# Altium PCB Flowmeter.PcbDoc (part 1 of 2)
Units mm, origin at the board's own origin, x right, y up, seen from the top; angles counter-clockwise.
Board outline 90 x 35 mm, 2 copper layers (Top Layer, Bottom Layer); 44 components, 30 nets, 148 pads, 33 vias.
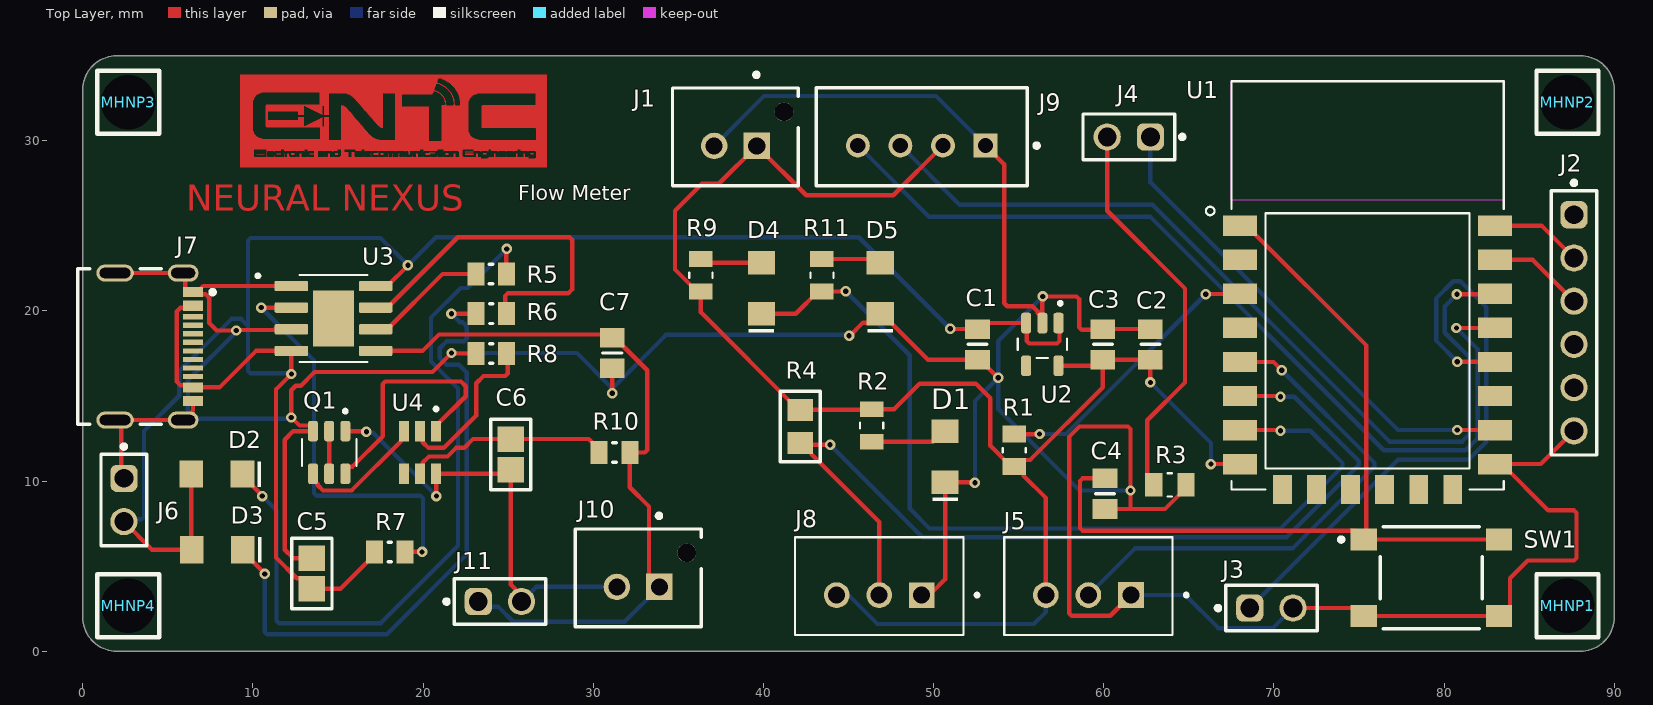
[diagram p0: Top Layer view]
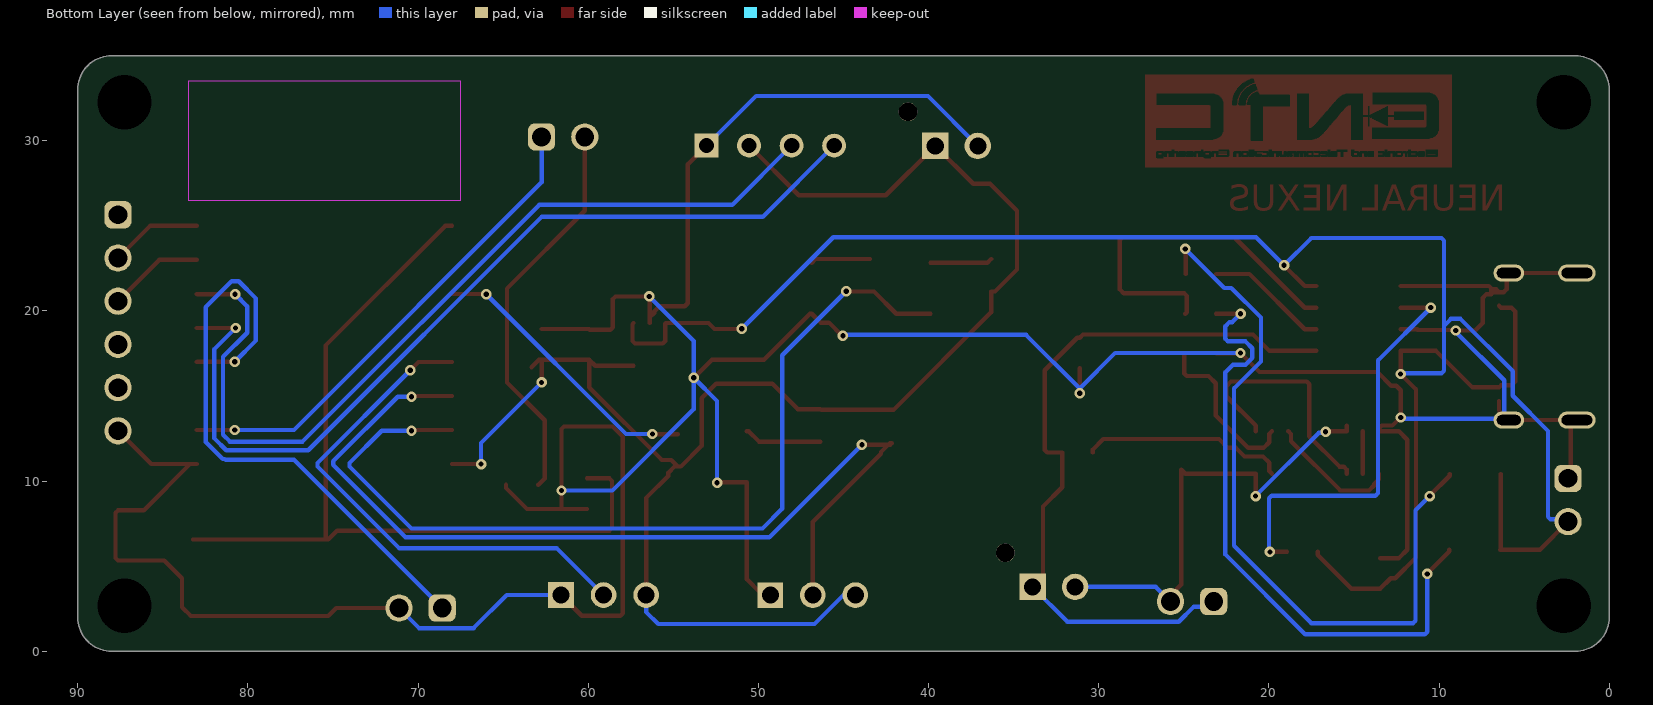
[diagram p1: Bottom Layer view, seen from below]
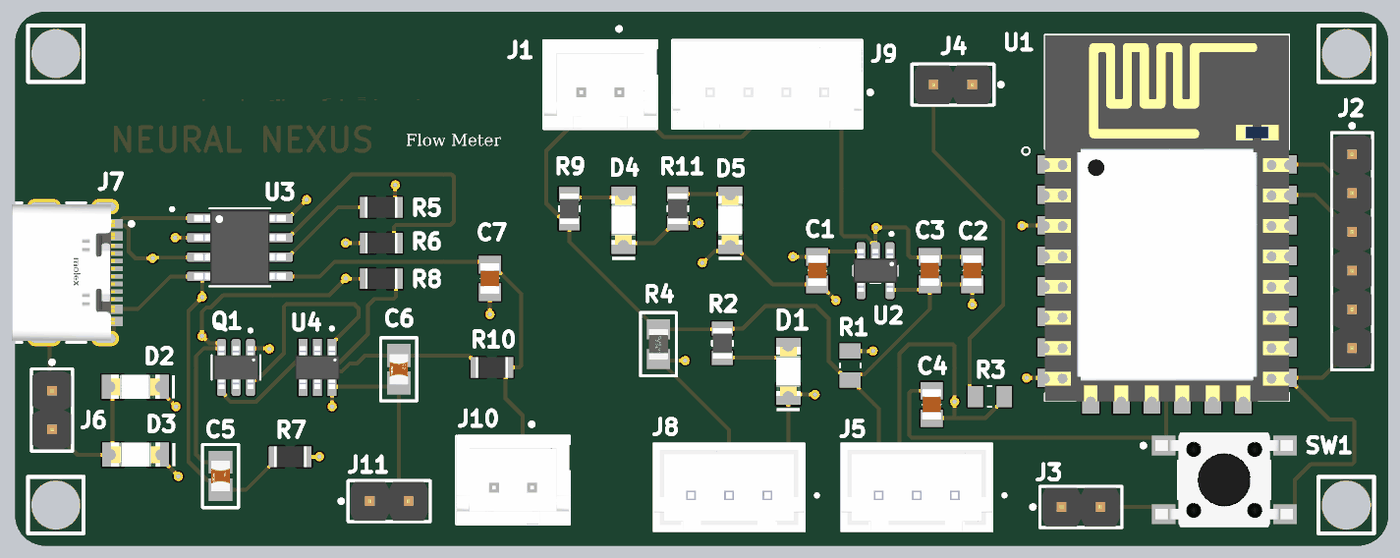
[diagram p2: 3D render of the assembled board from above, using the file's embedded part models]

## Layer stack, top to bottom
Top Solder: solder mask 0.0102, Solder Resist, Dk 3.5
Top Layer: signal copper 0.0356
Dielectric 1: dielectric 0.32, FR-4, Dk 4.8
Bottom Layer: signal copper 0.0356
Bottom Solder: solder mask 0.0102, Solder Resist, Dk 3.5

## Board outline
0,2 0,33 cw(c2,33) 2,35 88,35 cw(c88,33) 90,33 90,2 cw(c88,2) 88,0 2,0 cw(c2,2)

## Design rules (kind name [scope] priority, off if disabled: settings)
Clearance [All] p1: gap=0.254 ignorepadtopadclearanceinfootprint=FALSE except(0.152: SMDPad-SMDPad SMDPad-THPad SMDPad-Via)
HoleSize [All] p1: absolutevalues=TRUE maxlimit=4 minlimit=0.025 maxpercent=80.000 minpercent=20.000
MinimumSolderMaskSliver [All] p1: minsoldermaskwidth=0.08
PolygonConnect [All] p1: connectstyle=Relief reliefconductorwidth=0.254 reliefentries=4 polygonreliefangle="90 Angle" airgapwidth=0.254
RoutingVias [All] p1: holewidth=0.711 width=1.27 viastyle="Through Hole" minholewidth=0.3 minwidth=0.5 maxholewidth=0.711 maxwidth=1.27
SilkToSilkClearance [All] p1: silktosilkclearance=0.2
SilkToSolderMaskClearance [IsPad] p1: minsilkscreentomaskgap=0.2 clearancetoexposedcopper=TRUE
SolderMaskExpansion [All] p1: expansion=0.102 istentingtop=FALSE
SupplyNets "Schematic Supply Nets_2" [InNet('VCC 3V3')] p1: voltage=0.000
SupplyNets "Schematic Supply Nets_1" [InNet('VCC 5V0')] p2: voltage=0.000
SupplyNets "Schematic Supply Nets" [InNet('GND')] p3: voltage=0.000
Width [All] p1: maxlimit=2.54 minlimit=0.254 preferedwidth=0.254 bottomlayer_maxwidth=0.254 minimp=50.000000 maximp=50.000000 favimp=50.000000
26 further rules are at their usual default settings.

## Components (designator, comment, footprint, x,y, rotation, side; value= is the part's Value field where it differs from the comment)
C1 "1uF 10V 0805" CAPC2012X140N 52.578,18.034 r90 top value=1uF
C2 "1uF 10V 0805" CAPC2012X140N 62.738,18.034 r270 top value=1uF
C3 "10uF 10V 0805" CAPC2012X140N 59.944,18.034 r270 top value=10uF
C4 "1uF 10V 0805" CAPC2012X140N 60.071,9.26 r90 top value=1uF
C5 "100nF 50V 0805" FP-CC0805-0_85-IPC_A 13.462,4.572 r270 top value=100nF
C6 "100nF 50V 0805" FP-CC0805-0_85-IPC_A 25.146,11.569 r270 top value=100nF
C7 "10uF 10V 0805" CAPC2012X140N 31.115,17.526 r270 top value=10uF
D1 "Red" WL-SMCW_1206_150120xx75000 50.673,11.43 r90 top
D2 "Green" WL-SMCW_1206_150120xx75000 7.874,10.414 r180 top
D3 "Red" WL-SMCW_1206_150120xx75000 7.898,5.969 r180 top
D4 "Green" WL-SMCW_1206_150120xx75000 39.878,21.336 r90 top
D5 "Red" WL-SMCW_1206_150120xx75000 46.863,21.336 r90 top
J1 "B2B-XH-AM(LF)(SN)" FP-B2B-XH-AM_LF_SN-MFG 38.354,30.226 r0 top
J2 "6 pins" 61300611121 87.63,19.304 r270 top
J3 "2 pin" 61300211121 69.85,2.54 r0 top
J4 "2 pin" 61300211121 61.468,30.226 r180 top
J5 "B3B-XH-A" JST_B3B-XH-A 61.595,3.302 r0 top
J6 "2 pin" 61300211121 2.413,8.89 r270 top
J7 "217179-0001" FP-2171790001-MFG 3.048,17.907 r270 top
J8 "B3B-XH-A" JST_B3B-XH-A 49.3,3.3 r0 top
J9 "B4B-XH-A(LF)(SN)" FP-B4B-XH-A_LF_SN-MFG 49.296,30.243 r0 top
J10 "B2B-XH-AM(LF)(SN)" FP-B2B-XH-AM_LF_SN-MFG 32.634,4.31 r0 top
J11 "2 pin" 61300211121 24.511,2.921 r0 top
MHNP1 "Mounting Hole Non plated 3.2mm" MTHNP3P2MM 87.249,2.667 r90 top
MHNP2 "Mounting Hole Non plated 3.2mm" MTHNP3P2MM 87.249,32.258 r90 top
MHNP3 "Mounting Hole Non plated 3.2mm" MTHNP3P2MM 2.667,32.258 r90 top
MHNP4 "Mounting Hole Non plated 3.2mm" MTHNP3P2MM 2.667,2.667 r90 top
Q1 "FS8205" SOT95P280X145-6N 14.478,11.684 r270 top
R1 "10K 0805" RESC2012X65N 54.737,11.811 r90 top
R2 "150R" RESC2012X60N 46.355,13.274 r90 top
R3 "10K 0805" RESC2012X65N 63.881,9.779 r180 top
R4 "4.7K 0805" FP-CRGCQ0805-IPC_A 42.164,13.208 r90 top
R5 "1K 0805" RESC2013X60X35NL10T20 23.992,22.174 r0 top value=1kR
R6 "1K 0805" RESC2013X60X35NL10T20 24.003,19.837 r180 top value=1kR
R7 "1K 0805" RESC2013X60X35NL10T20 18.034,5.842 r0 top value=1kR
R8 "1K 0805" RESC2013X60X35NL10T20 24,17.5 r0 top value=1kR
R9 "150R" RESC2012X60N 36.322,22.098 r270 top
R10 "RC0805FR-07100RL" RESC2013X60X35NL10T20 31.242,11.684 r180 top
R11 "150R" RESC2012X60N 43.434,22.098 r270 top
SW1 "Push button" FP-PTS645SH50SMTR92LFS-MFG 79.248,4.318 r0 top
U1 "ESP8266-12E/ESP-12E" XCVR_ESP8266-12E/ESP-12E 75.5,18 r0 top
U2 "TLV75733PDBVR" SOT95P280X145-5N 56.388,18.034 r270 top
U3 "Battery Charger" SOP127P600X175-9N 14.732,19.558 r0 top
U4 "DW01A" "SOT95P280X145-6N - duplicate" 19.812,11.684 r270 top

## Footprints (in the part's own frame and the unit in brackets; to place one, negate y for a bottom-side part, rotate by r counter-clockwise, add the part's x,y. Pads: shape width x height; smd on the part's side, far side on the other; paste and mask are expansions set on the pad)
61300211121 [mm] "Pin Header, pitch 2.54 mm, THT, Vertical, single row, 2p"
  rrect50% 1.6x1.6 hole 1.1: 1(-1.27,0)
  round 1.6 hole 1.1: 2(1.27,0)
  silkscreen extent -3.26,-1.35 2.69,1.35, body extent -2.54,-1.27 2.54,1.27, height 8.57
61300611121 [mm] "Pin Header, pitch 2.54 mm, THT, Vertical, single row, 6p"
  rrect50% 1.6x1.6 hole 1.1: 1(-6.35,0)
  round 1.6 hole 1.1: 2(-3.81,0) 3(-1.27,0) 4(1.27,0) 5(3.81,0) 6(6.35,0)
  silkscreen extent -8.34,-1.35 7.77,1.35, body extent -7.62,-1.27 7.62,1.27, height 8.57
CAPC2012X140N [mm]
  rect 1.15x1.45 smd: 1(-0.9,0) 2(0.9,0)
  silkscreen extent 0,-0.55 0,0.55, body extent -1,-0.63 1,0.63, height 1.35
FP-2171790001-MFG [mm]
  rect 0.6x1.15 smd paste+0 mask+0: A1B12(-3.2,3.425) A4B9(-2.4,3.425) B1A12(3.2,3.425) B4A9(2.4,3.425)
  rect 0.3x1.15 smd paste+0 mask+0: A5(-1.25,3.425) A6(-0.25,3.425) A7(0.25,3.425) A8(1.25,3.425) B5(1.75,3.425) B6(0.75,3.425) B7(-0.75,3.425) B8(-1.75,3.425)
  rrect100% 1x1.8 hole 1.4 slot 0.6 at 0 deg paste-2539.97 mask+0: S1(-4.32,2.85) S2(4.32,2.85)
  rrect100% 1x2.2 hole 1.8 slot 0.6 at 0 deg paste-2539.97 mask+0: S3(-4.32,-1.15) S4(4.32,-1.15)
  silkscreen extent -4.57,-3.35 4.57,4.7, body extent -4.92,-3.45 4.92,4.1, height 0.25
FP-B2B-XH-AM_LF_SN-MFG [mm]
  rect 1.55x1.55 hole 1 paste-2539.97 mask+0: 1(1.25,-0.525)
  round 1.55 hole 1 paste-2539.97 mask+0: 2(-1.25,-0.525)
  round 1.1 hole 1.1 unplated paste-2539.97 mask+0: ""(2.85,1.475)
  silkscreen extent -3.7,-2.88 3.7,3.77, body extent -3.8,-2.98 3.8,2.98, height 0.25
FP-B4B-XH-A_LF_SN-MFG [mm]
  rect 1.4x1.4 hole 0.9 paste-2539.97 mask+0: 1(3.75,-0.525)
  round 1.4 hole 0.9 paste-2539.97 mask+0: 2(1.25,-0.525) 3(-1.25,-0.525) 4(-3.75,-0.525)
  silkscreen extent -6.2,-2.88 6.88,2.88, body extent -6.3,-2.98 6.3,2.98, height 0.25
FP-CC0805-0_85-IPC_A [mm]
  rect 1.505x1.556 smd paste+0 mask+0: 1(-0.901,0) 2(0.901,0)
  silkscreen extent -2.07,-1.18 2.07,1.18, body extent -2.15,-1.28 2.15,1.28, height 0.25
FP-CRGCQ0805-IPC_A [mm]
  rect 1.306x1.51 smd paste+0 mask+0: 1(-0.976,0) 2(0.976,0)
  silkscreen extent -2.07,-1.18 2.07,1.18, body extent -2.13,-1.25 2.13,1.25, height 0.25
FP-PTS645SH50SMTR92LFS-MFG [mm]
  rect 1.55x1.3 smd paste+0 mask+0: 1(-3.975,2.25) 2(3.975,2.25) 3(-3.975,-2.25) 4(3.975,-2.25)
  silkscreen extent -5.42,-3 3,3, body extent -4.5,-3 4.5,3, height 4.3
JST_B3B-XH-A [mm]
  rect 1.508x1.508 / inner round 1.508 / far side rect 1.508x1.508 hole 1: 1(0,0)
  round 1.508 hole 1: 2(-2.5,0) 3(-5,0)
  silkscreen extent -7.45,-2.35 3.35,3.4, body extent -7.45,-2.35 2.45,3.4, height 7
MTHNP3P2MM [mm] "Mounting Hole Non plated 3.2mm"
  round 1 hole 3.2: ""(0,0)
  silkscreen extent -1.85,-1.83 1.85,1.83
RESC2012X60N [mm]
  rect 0.92x1.38 smd: 1(-0.955,0) 2(0.955,0)
  silkscreen extent -0.17,-0.68 0.17,0.68, body extent -1,-0.63 1,0.63, height 0.6
RESC2012X65N [mm]
  rect 1.01x1.38 smd: 1(-0.95,0) 2(0.95,0)
  silkscreen extent -0.12,-0.68 0.12,0.68
RESC2013X60X35NL10T20 [mm] "Chip Resistor, 2-Leads, Body 2.1x1.35mm, IPC Medium Density"
  rect 1x1.35 smd: 1(-0.9,0) 2(0.9,0)
  silkscreen extent -0.1,-0.58 0.1,0.58, body extent -1.05,-0.68 1.05,0.67, height 0.6
SOP127P600X175-9N [mm]
  rrect25% 1.97x0.6 smd: 1(-2.475,1.905) 2(-2.475,0.635) 3(-2.475,-0.635) 4(-2.475,-1.905) 5(2.475,-1.905) 6(2.475,-0.635) 7(2.475,0.635) 8(2.475,1.905)
  rect 2.413x3.302 smd paste-3: 9(0,0)
  silkscreen extent -4.54,-2.55 2,2.6, body extent -3,-2.45 3,2.45, height 1.75
SOT95P280X145-5N [mm]
  rrect50% 1.21x0.59 smd: 1(-1.255,0.95) 2(-1.255,0) 3(-1.255,-0.95) 4(1.255,-0.95) 5(1.255,0.95)
  silkscreen extent -2.51,-1.45 0.8,1.45, body extent -1.4,-1.45 1.4,1.45, height 1.45
SOT95P280X145-6N [mm]
  rrect50% 1.21x0.59 smd: 1(-1.255,0.95) 2(-1.255,0) 3(-1.255,-0.95) 4(1.255,-0.95) 5(1.255,0) 6(1.255,0.95)
  silkscreen extent -2.53,-1.6 0.8,1.6, body extent -1.4,-1.45 1.4,1.45, height 1.45
"SOT95P280X145-6N - duplicate" [mm]
  rect 1.21x0.59 smd: 1(-1.255,0.95) 2(-1.255,0) 3(-1.255,-0.95) 4(1.255,-0.95) 5(1.255,0) 6(1.255,0.95)
  silkscreen extent -2.65,0.85 -2.46,1.05, body extent -1.4,-1.45 1.4,1.45, height 1.45
WL-SMCW_1206_150120xx75000 [mm] "SMD Mono-color Chip LED, body 3.2x1.6mm"
  rect 1.4x1.6 smd: 1(-1.5,0) 2(1.5,0)
  silkscreen extent -2.6,-0.75 -2.4,0.75, body extent -1.6,-0.8 1.6,0.8, height 0.68
XCVR_ESP8266-12E/ESP-12E [mm]
  rect 2x1.2 smd: 1(-7.5,7) 2(-7.5,5) 3(-7.5,3) 4(-7.5,1) 5(-7.5,-1) 6(-7.5,-3) 7(-7.5,-5) 8(-7.5,-7) 15(7.5,-7) 16(7.5,-5) 17(7.5,-3) 18(7.5,-1) 19(7.5,1) 20(7.5,3) 21(7.5,5) 22(7.5,7)
  rect 1.1x1.7 smd: 9(-5,-8.5) 10(-3,-8.5) 11(-1,-8.5) 12(1,-8.5) 13(3,-8.5) 14(5,-8.5)
  Keep-Out Layer region: 8,8.51 -8.009,8.51 -8.009,15.5 8,15.5
  Keep-Out Layer region: 8,8.51 -8.009,8.51 -8.009,15.5 8,15.5
  silkscreen extent -9.5,-8.5 8,15.5, body extent -8,-8.55 8,15.45, height 3

## Part data
C1 C2 C4: library part CL21B105KPFNNNE, "CCAP CER 1UF 10V X7R 0805", Capacitor Type=Ceramic, Case/Package=0805, Manufacturer=Samsung, Max Operating Temperature=125°C, Min Operating Temperature=-55°C, Package Shape=Rectangular, Package Style=SMTMeter, Rated DC Voltage (URdc)=10V, Supplier Part Number=1276-1275-1-ND, Temperature Characteristics Code=X7R, Tolerance  (fill in as +-)=10%, Category="Ceramic Capacitors", ComponentLink1Description=https://datasheet.ciiva.com:443/pdfs/VipMasterIC/IC/SEMS/SEMS-S-A0008523501/SEMS-S-A0008523532-1.pdf?src-supplier=IHS+Markit, ComponentLink1URL=https://datasheet.ciiva.com:443/pdfs/VipMasterIC/IC/SEMS/SEMS-S-A0008523501/SEMS-S-A0008523532-1.pdf?src-supplier=IHS+Markit, ComponentLink2Description=https://datasheet.ciiva.com/25799/cl21b105kpfnnne-25799843.pdf?src-supplier=Digikey, ComponentLink2URL=https://datasheet.ciiva.com/25799/cl21b105kpfnnne-25799843.pdf?src-supplier=Digikey, ComponentLink3Description=https://datasheet.ciiva.com/26838/getdatasheetpartid-358362-26838675.pdf?src-supplier=Verical, ComponentLink3URL=https://datasheet.ciiva.com/26838/getdatasheetpartid-358362-26838675.pdf?src-supplier=Verical, ComponentLink4Description=https://datasheet.ciiva.com/16384/cl05b104kq5nnnc-16384501.pdf?src-supplier=Future+Electronics, ComponentLink4URL=https://datasheet.ciiva.com/16384/cl05b104kq5nnnc-16384501.pdf?src-supplier=Future+Electronics, Dielectric Material=Ceramic, Height=1.35mm, JESD-609 Code=e3, Length=2mm, Manufacturer Part Number=CL21B105KPFNNNE, Mounting Technology="Surface Mount", Multilayer=Yes, Packaging="Tape and Reel", Pins=2, Pricing="1=0.1, 10=0.041, 100=0.0237, 1000=0.0151 (USD)", Reach SVHC Compliant=Yes, RoHS=Yes, RoHS Compliant=Yes, Stock=563518, Supplier=Digikey, Terminal Finish=Nickel, Termination=Wraparound, Tolerance (fill in as +-)=10%, Width=1.25mm
C3 C7: library part CL21B106KPQNNNE, "Ceramic Capacitor, Multilayer, Ceramic, 10V, 10% +Tol, 10% -Tol, X7R, 15% TC, 10uF, Surface Mount, 0805", Capacitor Type=Ceramic, Case/Package=0805, Manufacturer=Samsung, Max Operating Temperature=125°C, Min Operating Temperature=-55°C, Package Shape=Rectangular, Package Style=SMTMeter, Rated DC Voltage (URdc)=10V, Supplier Part Number=1276-1764-1-ND, Temperature Characteristics Code=X7R, Tolerance  (fill in as +-)=10%, Category="Ceramic Capacitors", ComponentLink1Description=https://datasheet.ciiva.com:443/pdfs/VipMasterIC/IC/SEMS/SEMS-S-A0008384515/SEMS-S-A0008873201-1.pdf?src-supplier=IHS+Markit, ComponentLink1URL=https://datasheet.ciiva.com:443/pdfs/VipMasterIC/IC/SEMS/SEMS-S-A0008384515/SEMS-S-A0008873201-1.pdf?src-supplier=IHS+Markit, ComponentLink2Description=https://datasheet.ciiva.com/25794/cl21b106kpqnnne-25794947.pdf?src-supplier=Digikey, ComponentLink2URL=https://datasheet.ciiva.com/25794/cl21b106kpqnnne-25794947.pdf?src-supplier=Digikey, Dielectric Material=Ceramic, Height=1.4mm, JESD-609 Code=e3, Length=2mm, Manufacturer Part Number=CL21B106KPQNNNE, Mounting Technology="Surface Mount", Multilayer=Yes, Packaging="Tape and Reel", Pins=2, Pricing="1=0.08, 10=0.03, 100=0.0256, 1000=0.02281 (USD)", Reach SVHC Compliant=Yes, RoHS=Yes, RoHS Compliant=Yes, Stock=679901, Supplier=Digikey, Terminal Finish=Nickel, Termination=Wraparound, Tolerance (fill in as +-)=10%, Width=1.25mm
C5 C6: library part CC0805KRX7R9BB104, "CAP CER 0.1UF 50V X7R 0805", Capacitor Type=Ceramic, Case/Package=0805, Manufacturer=Yageo, Max Operating Temperature=125°C, Min Operating Temperature=-55°C, Package Shape=Rectangular, Package Style=SMTMeter, Rated DC Voltage (URdc)=50V, Supplier Part Number=311-1140-1-ND, Temperature Characteristics Code=X7R, Tolerance  (fill in as +-)=10%, Category="Ceramic Capacitors", ComponentLink1Description=https://datasheet.ciiva.com:443/pdfs/VipMasterIC/IC/YAGO/YAGO-S-A0003557223/YAGO-S-A0003557223-1.pdf?src-supplier=IHS+Markit, ComponentLink1URL=https://datasheet.ciiva.com:443/pdfs/VipMasterIC/IC/YAGO/YAGO-S-A0003557223/YAGO-S-A0003557223-1.pdf?src-supplier=IHS+Markit, ComponentLink2Description=https://datasheet.ciiva.com/11786/0900766b80d84f1d-11786009.pdf?src-supplier=Rs, ComponentLink2URL=https://datasheet.ciiva.com/11786/0900766b80d84f1d-11786009.pdf?src-supplier=Rs, ComponentLink3Description=https://datasheet.ciiva.com/11464/upy-gphc-x7r-6-3v-to-50v-8-11464757.pdf?src-supplier=Avnet, ComponentLink3URL=https://datasheet.ciiva.com/11464/upy-gphc-x7r-6-3v-to-50v-8-11464757.pdf?src-supplier=Avnet, ComponentLink4Description=https://datasheet.ciiva.com/155/mlccorderingcode-155930.pdf?src-supplier=Digikey, ComponentLink4URL=https://datasheet.ciiva.com/155/mlccorderingcode-155930.pdf?src-supplier=Digikey, ComponentLink5Description=https://datasheet.ciiva.com/28450/1489800-28450805.pdf?src-supplier=Element14, ComponentLink5URL=https://datasheet.ciiva.com/28450/1489800-28450805.pdf?src-supplier=Element14, ComponentLink6Description=https://datasheet.ciiva.com/46393/1734573-46393307.pdf?src-supplier=Element14, ComponentLink6URL=https://datasheet.ciiva.com/46393/1734573-46393307.pdf?src-supplier=Element14, ComponentLink7Description=https://datasheet.ciiva.com/155/mlccorderingcode-155929.pdf?src-supplier=Digikey, ComponentLink7URL=https://datasheet.ciiva.com/155/mlccorderingcode-155929.pdf?src-supplier=Digikey, ComponentLink8Description=https://datasheet.ciiva.com/155/mlccorderingcode-155931.pdf?src-supplier=Digikey, ComponentLink8URL=https://datasheet.ciiva.com/155/mlccorderingcode-155931.pdf?src-supplier=Digikey, ComponentLink9Description=https://datasheet.ciiva.com/29242/445210-da-01-en-kerko-chip-0805-x7r-0-1uf-10proz-50vg-29242074.pdf?src-supplier=Conrad, ComponentLink9URL=https://datasheet.ciiva.com/29242/445210-da-01-en-kerko-chip-0805-x7r-0-1uf-10proz-50vg-29242074.pdf?src-supplier=Conrad, Dielectric Material=Ceramic, Height=0.85mm, JESD-609 Code=e3, Length=2mm, Manufacturer Part Number=CC0805KRX7R9BB104, Mounting Technology="Surface Mount", Multilayer=Yes, Packaging="Tape and Reel", Pins=2, Pricing="1=0.08, 10=0.027, 100=0.0192, 1000=0.0136 (USD)", Reach SVHC Compliant=Yes, RoHS=Yes, RoHS Compliant=Yes, Stock=2500824, Supplier=Digikey, Terminal Finish=Nickel, Termination=Wraparound, Tolerance (fill in as +-)=10%, Width=1.25mm
D1 D3 D5: library part 150120RS75000, "Single Color LED, Red, Water Clear, 2mm", Forward Current=30mA, Manufacturer="Wurth Electronics", Max Operating Temperature=85°C, Min Operating Temperature=-40°C, Supplier Part Number=732-4991-1-ND, Category=LEDs, Channels=1, Color=Red, ComponentLink1Description=https://datasheet.ciiva.com:443/pdfs/VipMasterIC/IC/MIDC/MIDC-S-A0007455952/MIDC-S-A0007455952-1.pdf?src-supplier=IHS+Markit, ComponentLink1URL=https://datasheet.ciiva.com:443/pdfs/VipMasterIC/IC/MIDC/MIDC-S-A0007455952/MIDC-S-A0007455952-1.pdf?src-supplier=IHS+Markit, ComponentLink2Description=https://datasheet.ciiva.com/29561/150120rs75000-29561888.pdf?src-supplier=Digikey, ComponentLink2URL=https://datasheet.ciiva.com/29561/150120rs75000-29561888.pdf?src-supplier=Digikey, ComponentLink3Description=https://datasheet.ciiva.com/29279/759442-da-01-en-chipled-1206-w-kl-rot-150120rs75000-29279067.pdf?src-supplier=Conrad, ComponentLink3URL=https://datasheet.ciiva.com/29279/759442-da-01-en-chipled-1206-w-kl-rot-150120rs75000-29279067.pdf?src-supplier=Conrad, ComponentLink4Description=https://datasheet.ciiva.com/48430/150120rs75000-eng-tds-48430054.pdf?src-supplier=Distrelec, ComponentLink4URL=https://datasheet.ciiva.com/48430/150120rs75000-eng-tds-48430054.pdf?src-supplier=Distrelec, ComponentLink5Description=https://datasheet.ciiva.com/22656/1911465-22656982.pdf?src-supplier=Element14, ComponentLink5URL=https://datasheet.ciiva.com/22656/1911465-22656982.pdf?src-supplier=Element14, Lens Style="WATER CLEAR", Luminous Intensity-Nom=150mcd, Manufacturer Part Number=150120RS75000, Mounting Technology="Surface Mount", Optoelectronic Device Type="SINGLE COLOR LED", Overall Height=0.68mm, Packaging="Tape and Reel", Pins=2, Pricing="1=0.23, 50=0.211, 100=0.182, 500=0.17596 (USD)", Reach SVHC Compliant=Yes, RoHS=Yes, RoHS Compliant=Yes, Shape=Rectangular, Size=2mm, Stock=39217, Supplier=Digikey, Terminal Pitch=3mm, Viewing Angle=140°
D2 D4: library part 150120VS75000, "Single Color LED, Bright Green, Water Clear, 2mm", Forward Current=30mA, Manufacturer="Wurth Electronics", Max Operating Temperature=85°C, Min Operating Temperature=-40°C, Supplier Part Number=732-4993-1-ND, Category=LEDs, Channels=1, Color=Green, ComponentLink1Description=https://datasheet.ciiva.com:443/pdfs/VipMasterIC/IC/MIDC/MIDC-S-A0007455949/MIDC-S-A0007455949-1.pdf?src-supplier=IHS+Markit, ComponentLink1URL=https://datasheet.ciiva.com:443/pdfs/VipMasterIC/IC/MIDC/MIDC-S-A0007455949/MIDC-S-A0007455949-1.pdf?src-supplier=IHS+Markit, ComponentLink2Description=https://datasheet.ciiva.com/29561/150120vs75000-29561865.pdf?src-supplier=Digikey, ComponentLink2URL=https://datasheet.ciiva.com/29561/150120vs75000-29561865.pdf?src-supplier=Digikey, ComponentLink3Description=https://datasheet.ciiva.com/29279/759444-da-01-en-chipled-1206-w-kl-h-gruen-150120vs7500-29279050.pdf?src-supplier=Conrad, ComponentLink3URL=https://datasheet.ciiva.com/29279/759444-da-01-en-chipled-1206-w-kl-h-gruen-150120vs7500-29279050.pdf?src-supplier=Conrad, ComponentLink4Description=https://datasheet.ciiva.com/22656/1911467-22656987.pdf?src-supplier=Element14, ComponentLink4URL=https://datasheet.ciiva.com/22656/1911467-22656987.pdf?src-supplier=Element14, ComponentLink5Description=https://datasheet.ciiva.com/29561/150120vs75000-29561867.pdf?src-supplier=Digikey, ComponentLink5URL=https://datasheet.ciiva.com/29561/150120vs75000-29561867.pdf?src-supplier=Digikey, ComponentLink6Description=https://datasheet.ciiva.com/29561/150120vs75000-29561866.pdf?src-supplier=Digikey, ComponentLink6URL=https://datasheet.ciiva.com/29561/150120vs75000-29561866.pdf?src-supplier=Digikey, Lens Style="WATER CLEAR", Luminous Intensity-Nom=40mcd, Manufacturer Part Number=150120VS75000, Mounting Technology="Surface Mount", Optoelectronic Device Type="SINGLE COLOR LED", Overall Height=0.68mm, Packaging="Tape and Reel", Pins=2, Pricing="1=0.23, 50=0.211, 100=0.182, 500=0.17596 (USD)", Reach SVHC Compliant=Yes, RoHS=Yes, RoHS Compliant=Yes, Shape=Rectangular, Size=2mm, Stock=34329, Supplier=Digikey, Terminal Pitch=3mm, Viewing Angle=140°
J1 J10: library part CMP-17439-000037-1, "CONN HEADER VERT 2POS 2.5MM", Color=Green, Contact Resistance=20mR, Housing Color=White, Max Current Rating=3A, Max Operating Temperature=85°C, Max Voltage Rating (AC)=250V, Min Operating Temperature=-25°C, Connector Type="Male Pin", Contact Material=Brass, Contact Plating=Tin, Contact Type="Male Pin", Depth=5.75mm, Fastening Type=Detent, Housing Material=Polyamide, Lead Free="Lead Free", Length=7.4mm, Mount="Through Hole", Number of Positions=2, Number of Rows=1, Orientation=Straight, Packaging=Bulk, Pitch=2.5mm, Series=XH, Termination=Solder
J2: library part 61300611121, "Board Connector, 6 Contact(s), 1 Row(s), Male, Straight, 0.1 inch Pitch, Solder Terminal, Locking, Black Insulator, Plug", Contact Resistance=20mR, Dielectric Withstanding Voltage (AC)=500V, Insulation Color=Black, Insulation Resistance=1GR, Manufacturer="Wurth Electronics", Max Operating Temperature=125°C, Min Operating Temperature=-40°C, Rated Current (Signal)=3A, Supplier Part Number=732-5319-ND, Body Breadth=0.1inch, Body Depth=0.1inch, Body Length=0.6inch, Body/Shell Style=PLUG, Category="Headers and Wire Housings", ComponentLink1Description=https://datasheet.ciiva.com:443/pdfs/VipMasterIC/IC/MIDC/MIDCS07676/MIDCS07676-1.pdf?src-supplier=IHS+Markit, ComponentLink1URL=https://datasheet.ciiva.com:443/pdfs/VipMasterIC/IC/MIDC/MIDCS07676/MIDCS07676-1.pdf?src-supplier=IHS+Markit, ComponentLink2Description=http://www.mouser.com/ds/2/445/6130xx11121-538006.pdf?src-supplier=Mouser, ComponentLink2URL=http://www.mouser.com/ds/2/445/6130xx11121-538006.pdf?src-supplier=Mouser, ComponentLink3Description=http://www.farnell.com/cad/1737268.pdf?src-supplier=Element14, ComponentLink3URL=http://www.farnell.com/cad/1737268.pdf?src-supplier=Element14, ComponentLink4Description=https://datasheet.octopart.com/61300611121-W%C3%BCrth-Elektronik-datasheet-21154836.pdf?src-supplier=Element14, ComponentLink4URL=https://datasheet.octopart.com/61300611121-W%C3%BCrth-Elektronik-datasheet-21154836.pdf?src-supplier=Element14, ComponentLink5Description=https://katalog.we-online.de/em/datasheet/6130xx11121.pdf?src-supplier=Digikey, ComponentLink5URL=https://katalog.we-online.de/em/datasheet/6130xx11121.pdf?src-supplier=Digikey, Connector Type="BOARD CONNECTOR", Contact Finish - Mating=GOLD, Contact Finish - Termination="Gold (Au) - with Nickel (Ni) barrier", Contact Gender=Male, Contact Material="Copper Alloy", Contact Pattern=RECTANGULAR, Contact Style="SQ PIN-SKT", Insulation Material=Polybutylene, JESD-609 Code=e4, Manufacturer Part Number=61300611121, Mating Contact Pitch=0.1inch, Mounting Option 1=LOCKING, Mounting Style=STRAIGHT, Mounting Technology=Board, Number Of Connectors=1, Number of Contacts=6, Number of Rows Loaded=1, PCB Contact Pattern=RECTANGULAR, Pricing="1=0.31, 10=0.268, 25=0.2224, 50=0.1864, 100=0.1683, 1000=0.1539 (USD)", Reach SVHC Compliant=Yes, Reference Standard=UL, Reliability=COMMERCIAL, RoHS=Yes, RoHS Compliant=Yes, Stock=15473, Supplier=Digikey, Terminal Length=0.118inch, Terminal Pitch=2.54mm, Termination=Solder
J3 J4 J6 J11: library part 61300211121, "Board Connector, 2 Contact(s), 1 Row(s), Male, Straight, 0.1 inch Pitch, Solder Terminal, Locking, Black Insulator, Plug", Contact Resistance=20mR, Dielectric Withstanding Voltage (AC)=500V, Flammability Rating="UL94 V-0", Insulation Color=Black, Insulation Resistance=1GR, Manufacturer="Wurth Electronics", Max Operating Temperature=125°C, Min Operating Temperature=-40°C, Rated Current (Signal)=3A, Supplier Part Number=732-5315-ND, Body Breadth=0.1inch, Body Depth=0.1inch, Body Length=0.2inch, Body/Shell Style=PLUG, Category="Headers and Wire Housings", ComponentLink1Description=https://datasheet.ciiva.com:443/pdfs/VipMasterIC/IC/MIDC/MIDCS07676/MIDCS07676-1.pdf?src-supplier=IHS+Markit, ComponentLink1URL=https://datasheet.ciiva.com:443/pdfs/VipMasterIC/IC/MIDC/MIDCS07676/MIDCS07676-1.pdf?src-supplier=IHS+Markit, ComponentLink2Description=https://datasheet.ciiva.com/13619/6130xx11121-48870-13619345.pdf?src-supplier=Mouser, ComponentLink2URL=https://datasheet.ciiva.com/13619/6130xx11121-48870-13619345.pdf?src-supplier=Mouser, Connector Type="BOARD CONNECTOR", Contact Finish - Mating=GOLD, Contact Finish - Termination="Gold (Au) - with Nickel (Ni) barrier", Contact Gender=Male, Contact Material="Copper Alloy", Contact Pattern=RECTANGULAR, Contact Style="SQ PIN-SKT", DIN Conformance=No, Filter Feature=No, IEC Conformance=No, Insulation Material=Polybutylene, JESD-609 Code=e4, Manufacturer Part Number=61300211121, Mating Contact Pitch=0.1inch, MIL Conformance=No, Mixed Contacts=No, Mounting Option 1=LOCKING, Mounting Style=STRAIGHT, Mounting Technology=Board, Number Of Connectors=1, Number of Contacts=2, Number of Rows Loaded=1, Option="General Purpose", PCB Contact Pattern=RECTANGULAR, Pricing="1=0.12, 10=0.102, 25=0.0848, 50=0.0712, 100=0.0639, 1000=0.06 (USD)", Reach SVHC Compliant=Yes, Reference Standard=UL, Reliability=COMMERCIAL, RoHS=Yes, RoHS Compliant=Yes, Stock=191097, Supplier=Digikey, Terminal Length=0.118inch, Terminal Pitch=2.54mm, Termination=Solder
J5 J8: "Connector Header Through Hole 3 position 0.098 (2.50mm)", Package=None, Check_prices=https://www.snapeda.com/parts/B3B-XH-A/JST+Sales+America+Inc./view-part/?ref=eda, MF="JST Sales", MP=B3B-XH-A, SnapEDA_Link=https://www.snapeda.com/parts/B3B-XH-A/JST+Sales+America+Inc./view-part/?ref=snap
J7: "CONN RCP USB2.0 TYP C 24P SMD RA", LCSC Part Number=C3197684, Manufacturer=Molex, Supplier Part Number=900-2171790001CT-ND, Category=Connectors, Manufacturer Part Number=217179-0001, Pricing="1=0.9, 10=0.745, 100=0.6212 (USD)", RoHS=No, Stock=7228, Supplier=Digikey
J9: library part CMP-17439-000250-1, "CONN HEADER VERT 4POS 2.5MM", Color=Natural, Contact Resistance=20mR, Current Rating=3A, Flammability Rating="UL94 V-0", Housing Color=White, Insulation Resistance=1GR, Max Operating Temperature=85°C, Max Voltage Rating (AC)=250V, Min Operating Temperature=-25°C, Package Quantity=500, Connector Type=Header, Contact Finish - Mating=TIN, Contact Material=Brass, Contact Plating=Tin, Contact Shape=Square, Contact Type="Male Pin", Depth=5.75mm, Fastening Type=Detent, Gender=Male, Housing Material=Polyamide, Insulation Color=Natural, Insulation Material=Nylon, Lead Free="Lead Free", Lead Pitch=2.5mm, Length=12.4mm, Mated Stacking Heights=9.8mm, Material=Polyamide, Max Current Rating=3A, Max Voltage Rating (DC)=250V, Mount="Through Hole", Number of Contacts=4, Number of Positions=4, Number of Rows=1, Orientation=Straight, Packaging=Bulk, Pitch=2.5mm, REACH SVHC="No SVHC", Series=XH, Termination=Solder, Voltage Rating=250V, Voltage Rating (AC)=250V, Wire/Cable Gauge=22AWG
MHNP1 MHNP2 MHNP3 MHNP4: library part MTHNP3P2MM
Q1: "Dual N-Channel Enhancement Mode Power MOSFET", Package=Package, Check_prices=https://www.snapeda.com/parts/FS8205/Fortune+Semiconductor/view-part/?ref=eda, MF="Fortune Semiconductor", MP=FS8205, SnapEDA_Link=https://www.snapeda.com/parts/FS8205/Fortune+Semiconductor/view-part/?ref=snap
R1 R3: library part RMCF0805FT10K0, "RES 10K OHM 1% 1/8W 0805", Package=None, Availability=Unavailable, MF="{'manufacturer': u'Stackpole Electronics Inc'}", MP=RMCF0805FT10K0, Price=None
R2 R9 R11: library part RC0805FR-07150RL, "Fixed Resistor, Metal Glaze/thick Film, 0.125W, 150ohm, 150V, 1% +/-Tol, 100ppm/Cel, Surface Mount, 0805", Case/Package=0805, Manufacturer=Yageo, Max Operating Temperature=155°C, Min Operating Temperature=-55°C, Package Height=0.5mm, Package Length=2mm, Package Shape=Rectangular, Package Width=1.25mm, Power=125mW, Rated Temperature=70°C, Resistor Type="FIXED RESISTOR", Supplier Part Number=311-150CRCT-ND, Temperature Coefficient (ppm/Cel)=100, Tolerance=1%, Working Voltage=150V, Additional Feature="LASER TRIMMABLE", Category="Chip SMD Resistors", ComponentLink1Description=https://datasheet.ciiva.com:443/pdfs/VipMasterIC/IC/YAGO/YAGO-S-A0008145938/YAGO-S-A0008145938-1.pdf?src-supplier=IHS+Markit, ComponentLink1URL=https://datasheet.ciiva.com:443/pdfs/VipMasterIC/IC/YAGO/YAGO-S-A0008145938/YAGO-S-A0008145938-1.pdf?src-supplier=IHS+Markit, ComponentLink2Description=https://datasheet.ciiva.com/11819/0900766b8106beab-11819782.pdf?src-supplier=Rs, ComponentLink2URL=https://datasheet.ciiva.com/11819/0900766b8106beab-11819782.pdf?src-supplier=Rs, ComponentLink3Description=https://datasheet.ciiva.com/2456/pyu-r-int-thick-7-2456999.pdf?src-supplier=Digikey, ComponentLink3URL=https://datasheet.ciiva.com/2456/pyu-r-int-thick-7-2456999.pdf?src-supplier=Digikey, ComponentLink4Description=https://datasheet.ciiva.com/2457/pyu-r-int-thick-7-2457000.pdf?src-supplier=Digikey, ComponentLink4URL=https://datasheet.ciiva.com/2457/pyu-r-int-thick-7-2457000.pdf?src-supplier=Digikey, ComponentLink5Description=https://datasheet.ciiva.com/2457/pyu-r-int-thick-7-2457001.pdf?src-supplier=Digikey, ComponentLink5URL=https://datasheet.ciiva.com/2457/pyu-r-int-thick-7-2457001.pdf?src-supplier=Digikey, ComponentLink6Description=https://datasheet.ciiva.com/12668/rc0805-12668251.pdf?src-supplier=Mouser, ComponentLink6URL=https://datasheet.ciiva.com/12668/rc0805-12668251.pdf?src-supplier=Mouser, ComponentLink7Description=https://datasheet.ciiva.com/7660/38627-7660798.pdf?src-supplier=Element14, ComponentLink7URL=https://datasheet.ciiva.com/7660/38627-7660798.pdf?src-supplier=Element14, ComponentLink8Description=https://datasheet.ciiva.com/46447/444164-46447566.pdf?src-supplier=Element14, ComponentLink8URL=https://datasheet.ciiva.com/46447/444164-46447566.pdf?src-supplier=Element14, Construction=Chip, JESD-609 Code=e3, Manufacturer Part Number=RC0805FR-07150RL, Mounting Technology="Surface Mount", Packaging="Tape and Reel", Pins=2, Pricing="1=0.1, 10=0.014, 100=0.0112, 1000=0.00714 (USD)", Reach SVHC Compliant=Yes, RoHS=Yes, RoHS Compliant=Yes, Stock=933412, Supplier=Digikey, Technology="METAL GLAZE/THICK FILM", Terminal Finish=Nickel, Termination=Wraparound
R4: library part CRGCQ0805F4K7, "Fixed Resistor, Metal Glaze/thick Film, 0.125W, 4700ohm, 150V, 1% +/-Tol, 100ppm/Cel, Surface Mount, 0805", Manufacturer="TE Connectivity", Resistor Type="FIXED RESISTOR", Supplier Part Number=A129757CT-ND, Category="Chip SMD Resistors", ComponentLink1Description=https://datasheet.ciiva.com:443/pdfs/VipMasterIC/IC/TYEL/TYEL-S-A0004929575/TYEL-S-A0004929575-1.pdf?src-supplier=IHS+Markit, ComponentLink1URL=https://datasheet.ciiva.com:443/pdfs/VipMasterIC/IC/TYEL/TYEL-S-A0004929575/TYEL-S-A0004929575-1.pdf?src-supplier=IHS+Markit, ComponentLink2Description=http://datasheet.octopart.com/CRGCQ0805F4K7-TE-Connectivity-datasheet-114679081.pdf?src-supplier=Mouser, ComponentLink2URL=http://datasheet.octopart.com/CRGCQ0805F4K7-TE-Connectivity-datasheet-114679081.pdf?src-supplier=Mouser, ComponentLink3Description=http://datasheet.octopart.com/CRGCQ0805F4K7-TE-Connectivity-datasheet-114679081.pdf?src-supplier=Verical, ComponentLink3URL=http://datasheet.octopart.com/CRGCQ0805F4K7-TE-Connectivity-datasheet-114679081.pdf?src-supplier=Verical, ComponentLink4Description=http://datasheet.octopart.com/CRGCQ0805F4K7-TE-Connectivity-datasheet-114679081.pdf?src-supplier=Onlinecomponents.com, ComponentLink4URL=http://datasheet.octopart.com/CRGCQ0805F4K7-TE-Connectivity-datasheet-114679081.pdf?src-supplier=Onlinecomponents.com, ComponentLink5Description=http://datasheet.octopart.com/CRGCQ0805F4K7-TE-Connectivity-datasheet-114679081.pdf?src-supplier=Arrow+Electronics, ComponentLink5URL=http://datasheet.octopart.com/CRGCQ0805F4K7-TE-Connectivity-datasheet-114679081.pdf?src-supplier=Arrow+Electronics, ComponentLink6Description=http://datasheet.octopart.com/CRGCQ0805F4K7-TE-Connectivity-datasheet-114679081.pdf?src-supplier=Digikey, ComponentLink6URL=http://datasheet.octopart.com/CRGCQ0805F4K7-TE-Connectivity-datasheet-114679081.pdf?src-supplier=Digikey, ComponentLink7Description=https://www.te.com/commerce/DocumentDelivery/DDEController?Action=srchrtrv&amp;DocNm=1773204-3&amp;DocType=DS&amp;DocLang=English&src-supplier=Digikey, ComponentLink7URL=https://www.te.com/commerce/DocumentDelivery/DDEController?Action=srchrtrv&amp;DocNm=1773204-3&amp;DocType=DS&amp;DocLang=English&src-supplier=Digikey, ComponentLink8Description=http://datasheet.octopart.com/CRGCQ0805F4K7-TE-Connectivity-datasheet-114679081.pdf?src-supplier=Newark, ComponentLink8URL=http://datasheet.octopart.com/CRGCQ0805F4K7-TE-Connectivity-datasheet-114679081.pdf?src-supplier=Newark, ComponentLink9Description=http://datasheet.octopart.com/CRGCQ0805F4K7-TE-Connectivity-datasheet-114679081.pdf?src-supplier=Avnet, ComponentLink9URL=http://datasheet.octopart.com/CRGCQ0805F4K7-TE-Connectivity-datasheet-114679081.pdf?src-supplier=Avnet, ComponentLink10Description=http://datasheet.octopart.com/CRGCQ0805F4K7-TE-Connectivity-datasheet-114679081.pdf?src-supplier=Farnell, ComponentLink10URL=http://datasheet.octopart.com/CRGCQ0805F4K7-TE-Connectivity-datasheet-114679081.pdf?src-supplier=Farnell, ComponentLink11Description=https://4donline.ihs.com/images/VipMasterIC/IC/TYEL/TYEL-S-A0004929575/TYEL-S-A0004929575-1.pdf?hkey=52A5661711E402568146F3353EA87419&src-supplier=Farnell, ComponentLink11URL=https://4donline.ihs.com/images/VipMasterIC/IC/TYEL/TYEL-S-A0004929575/TYEL-S-A0004929575-1.pdf?hkey=52A5661711E402568146F3353EA87419&src-supplier=Farnell, ComponentLink12Description=http://datasheet.octopart.com/CRGCQ0805F4K7-TE-Connectivity-datasheet-114679081.pdf?src-supplier=TME, ComponentLink12URL=http://datasheet.octopart.com/CRGCQ0805F4K7-TE-Connectivity-datasheet-114679081.pdf?src-supplier=TME, ComponentLink13Description=http://datasheet.octopart.com/CRGCQ0805F4K7-TE-Connectivity-datasheet-114679081.pdf?src-supplier=Electro+Sonic, ComponentLink13URL=http://datasheet.octopart.com/CRGCQ0805F4K7-TE-Connectivity-datasheet-114679081.pdf?src-supplier=Electro+Sonic, ComponentLink14Description=http://datasheet.octopart.com/CRGCQ0805F4K7-TE-Connectivity-datasheet-114679081.pdf?src-supplier=Sager+Electronics, ComponentLink14URL=http://datasheet.octopart.com/CRGCQ0805F4K7-TE-Connectivity-datasheet-114679081.pdf?src-supplier=Sager+Electronics, ComponentLink15Description=http://datasheet.octopart.com/CRGCQ0805F4K7-TE-Connectivity-datasheet-114679081.pdf?src-supplier=Heilind+Electronics, ComponentLink15URL=http://datasheet.octopart.com/CRGCQ0805F4K7-TE-Connectivity-datasheet-114679081.pdf?src-supplier=Heilind+Electronics, ComponentLink16Description=https://datasheet.octopart.com/CRGCQ0805F4K7-TE-Connectivity-datasheet-114679081.pdf?src-supplier=Master+Electronics, ComponentLink16URL=https://datasheet.octopart.com/CRGCQ0805F4K7-TE-Connectivity-datasheet-114679081.pdf?src-supplier=Master+Electronics, Manufacturer Part Number=CRGCQ0805F4K7, Pins=2, Pricing="1=0.1, 10=0.036, 100=0.0183, 1000=0.01057, 2500=0.00886 (USD)", Reach SVHC Compliant=Yes, RoHS=Yes, RoHS Compliant=Yes, Stock=634679, Supplier=Digikey
R5 R6 R7 R8: library part RC0805FR-071KL, "RES 1K OHM 1% 1/8W 0805", Case/Package=0805, Manufacturer=Yageo, Max Operating Temperature=155°C, Min Operating Temperature=-55°C, Package Height=0.5mm, Package Length=2mm, Package Shape=Rectangular, Package Width=1.25mm, Power=125mW, Rated Temperature=70°C, Resistor Type="FIXED RESISTOR", Supplier Part Number=311-1.00KCRCT-ND, Temperature Coefficient (ppm/Cel)=100, Tolerance=1%, Working Voltage=150V, Additional Feature="LASER TRIMMABLE", Category="Chip SMD Resistors", ComponentLink1Description=https://datasheet.ciiva.com:443/pdfs/VipMasterIC/IC/YAGO/YAGO-S-A0008145938/YAGO-S-A0008145938-1.pdf?src-supplier=IHS+Markit, ComponentLink1URL=https://datasheet.ciiva.com:443/pdfs/VipMasterIC/IC/YAGO/YAGO-S-A0008145938/YAGO-S-A0008145938-1.pdf?src-supplier=IHS+Markit, ComponentLink2Description=https://datasheet.ciiva.com/7941/1686128-7941719.pdf?src-supplier=Element14, ComponentLink2URL=https://datasheet.ciiva.com/7941/1686128-7941719.pdf?src-supplier=Element14, ComponentLink3Description=https://datasheet.ciiva.com/46385/444164-46385020.pdf?src-supplier=Element14, ComponentLink3URL=https://datasheet.ciiva.com/46385/444164-46385020.pdf?src-supplier=Element14, ComponentLink4Description=https://datasheet.ciiva.com/2456/pyu-r-int-thick-7-2456976.pdf?src-supplier=Digikey, ComponentLink4URL=https://datasheet.ciiva.com/2456/pyu-r-int-thick-7-2456976.pdf?src-supplier=Digikey, ComponentLink5Description=https://datasheet.ciiva.com/2456/pyu-r-int-thick-7-2456977.pdf?src-supplier=Digikey, ComponentLink5URL=https://datasheet.ciiva.com/2456/pyu-r-int-thick-7-2456977.pdf?src-supplier=Digikey, ComponentLink6Description=https://datasheet.ciiva.com/2456/pyu-r-int-thick-7-2456975.pdf?src-supplier=Digikey, ComponentLink6URL=https://datasheet.ciiva.com/2456/pyu-r-int-thick-7-2456975.pdf?src-supplier=Digikey, ComponentLink7Description=https://datasheet.ciiva.com/16850/rc0805-16850409.pdf?src-supplier=Future+Electronics, ComponentLink7URL=https://datasheet.ciiva.com/16850/rc0805-16850409.pdf?src-supplier=Future+Electronics, Construction=Chip, JESD-609 Code=e3, Manufacturer Part Number=RC0805FR-071KL, Mounting Technology="Surface Mount", Packaging="Tape and Reel", Pins=2, Pricing="1=0.1, 10=0.012, 100=0.0112, 1000=0.00714 (USD)", Reach SVHC Compliant=Yes, RoHS=Yes, RoHS Compliant=Yes, Stock=458544, Supplier=Digikey, Technology="METAL GLAZE/THICK FILM", Terminal Finish=Nickel, Termination=Wraparound
R10: library part CMP-2100-03669-1, "Chip Resistor, 100 Ohm, +/-1%, 0.125 W, -55 to 155 degC, 0805 (2012 Metric), RoHS, Tape and Reel", Case Code (Imperial)=0805, Case Code (Metric)=2012, Manufacturer=Yageo, Max Operating Temperature=155degC, Max Power Dissipation=125mW, Min Operating Temperature=-55degC, Package Description="2-Pin Surface Mounted Device, Body 2 x 1.25 mm", Package Quantity=1, Resistance=100Ohm, Temperature Coefficient=100ppm/degreesC, Tolerance=1%, Voltage Rating=150V, Case/Package=0805, Composition=ThickFilm, Datasheet URL=http://www.yageo.com/NewPortal/yageodocoutput?fileName=/pdf/R-Chip/PYu-RC_Group_51_RoHS_L_5.pdf, Datasheet Version="Rev. 5, 10/2016", Depth=1.25mm, Height=0.024inch, Lead Free=LeadFree, Lead Pitch=0.4mm, Length=2mm, Manufacturer URL=http://www.yageo.com/, Military Standard=Not, Number of Pins=2, Number of Terminations=2, Package Reference=0805, Packaging=TapeandReel, Power Rating=125mW, REACH SVHC=Unknown, RoHSCompliant=true, Termination=SMD/SMT, Voltage Rating (DC)=150V, Width=0.049inch
SW1: library part PTS645SH50SMTR92LFS, "SWITCH TACTILE SPST-NO 0.05A 12V", Contact Current(DC)-Max=50mA, Contact DC Max Rating R Load=0.05A@12VDC, Contact Resistance=0.1mR, Contact Voltage(DC)-Max=12V, Dielectric Withstand Volts=250VACV, Insulation Resistance=100GR, LCSC Part Number=C221869, Manufacturer="ITT C&K", Manufacturer Series=PTS645, Max Operating Temperature=60°C, Min Operating Temperature=-20°C, Supplier Part Number=CKN9085CT-ND, Actuator Type=Pushbutton, Body Breadth=5.9944inch, Body Height=3.4544mm, Body Length or Diameter=5.9944mm, Category="Tactile Switches", ComponentLink1Description=https://datasheet.ciiva.com:443/pdfs/VipMasterIC/IC/CKCI/CKCI-S-A0001796527/CKCI-S-A0001796842-1.pdf?src-supplier=IHS+Markit, ComponentLink1URL=https://datasheet.ciiva.com:443/pdfs/VipMasterIC/IC/CKCI/CKCI-S-A0001796527/CKCI-S-A0001796842-1.pdf?src-supplier=IHS+Markit, ComponentLink2Description=https://datasheet.ciiva.com/29903/getdatasheetpartid-773702-29903807.pdf?src-supplier=Verical, ComponentLink2URL=https://datasheet.ciiva.com/29903/getdatasheetpartid-773702-29903807.pdf?src-supplier=Verical, ComponentLink3Description=https://datasheet.ciiva.com/14920/pts645-14920741.pdf?src-supplier=Digikey, ComponentLink3URL=https://datasheet.ciiva.com/14920/pts645-14920741.pdf?src-supplier=Digikey, ComponentLink4Description=https://datasheet.ciiva.com/22637/1707731-22637356.pdf?src-supplier=Element14, ComponentLink4URL=https://datasheet.ciiva.com/22637/1707731-22637356.pdf?src-supplier=Element14, Electrical Life=100000Cycles, JESD-609 Code=e4, Manufacturer Part Number=PTS645SH50SMTR92LFS, Mounting Technology="Surface Mount", PCB Hole Count=4, Pricing="1=0.35, 10=0.337, 25=0.3172, 100=0.2753, 250=0.24972, 500=0.2323 (USD)", Reach SVHC Compliant=Yes, RoHS=Yes, RoHS Compliant=Yes, Stock=64637, Supplier=Digikey, Switch Action=MOMENTARY, Switch Function=SPST, Switch Type=Keypad, Terminal Finish=Silver, Terminal Length=0.138inch, Termination=Solder
U1: "This WiFi module has a 32-bit MCU micro and clock speeds supporting 80 MHz or 160 MHz. Supports the RTOS and integrated Wi-Fi MAC/BB/RF/PA/LNA, and has an on-board antenna."
U2: "1-A, low-IQ high-accuracy low-dropout (LDO) voltage regulator with enable"
U3: library part TP4056, "Complete single cell Li-Ion battery with a constant current / constant voltage linear charger", Package=Package, Availability="Not in stock", Check_prices=https://www.snapeda.com/parts/TP4056/NanJing+Top+Power+ASIC+Corp./view-part/?ref=eda, MF="NanJing Top Power ASIC Corp.", MP=TP4056, Price=None, SnapEDA_Link=https://www.snapeda.com/parts/TP4056/NanJing+Top+Power+ASIC+Corp./view-part/?ref=snap
U4: "One Cell Lithium-ion/Polymer Battery Protection IC", Package="SOT-23-6 Fortune Semiconductor", Check_prices=https://www.snapeda.com/parts/DW01A/Fortune+Semiconductor/view-part/?ref=eda, MF="Fortune Semiconductor", MP=DW01A, SnapEDA_Link=https://www.snapeda.com/parts/DW01A/Fortune+Semiconductor/view-part/?ref=snap

## Via types
v1: diameter 0.61, hole 0.305, Top Layer to Bottom Layer, 33 vias

## Nets (pads, with @x,y where several pads share a name; then routed paths per layer and width w, separated by ;. In a path a pad name is that pad's centre, name@x,y a point inside that pad or via, vN(x,y) a via of type N, cw(c..) or ccw(c..) an arc to the next point about the centre after c; other vN are vias at no path point)
BAT+: C7.1 J10.1 J11.1 R10.1 U3.5 | length 43.5
  Top Layer w0.254: U3.5 19.964,17.653 20.93,18.618 30.923,18.618 C7.1 31.265,18.426 33.172,16.519 33.172,11.833 33.023,11.684 R10.1 32.142,9.641 33.274,8.509 33.274,4.433 33.66,4.047 J10.1@33.889,4.047
  Bottom Layer w0.254: J11.1 23.552,2.61 24.422,2.61 25.292,1.74 31.839,1.74 J10.1
BAT-: C6.2 J10.2 J11.2 Q1.1 U4.6 | length 27
  Top Layer w0.254: Q1.1@15.428,13.249 Q1.1 16.627,12.939 v1(16.662,12.903) ; v1(20.777,9.119) 20.762,9.134 U4.6 24.907,10.429 C6.2 25.146,3.92 25.781,3.285 J11.2
  Bottom Layer w0.254: v1(16.662,12.903) 16.728,12.837 17.058,12.837 v1(20.777,9.119) ; J11.2 26.645,3.785 J10.2
EN: R1.2 U1.3 | length 16.7
  Top Layer w0.254: R1.2 56.22,12.761 v1@56.236,12.776 ; v1@65.964,20.955 66.009,21 U1.3
  Bottom Layer w0.254: v1(56.228,12.769) 57.777,12.769 v1(65.986,20.977)
GND: C1.1 C2.1 C3.1 C4.1 C5.1 C7.2 D1.1 D5.1 J1.2 J2.6 J3.2 J5.1 J6.1 J7.A1B12 J7.B1A12 J7.S1 J7.S2 J7.S3 J7.S4 J8.1 J9.1 Q1.3 R3.1 R8.1 SW1.3 SW1.4 U1.15 U2.2 U3.1 U3.3 | length 250.4
  Top Layer w0.254: J7.S4 J7.S4@1.911,13.587 ; J7.S3 J7.S1 6.025,22.1 6.025,21.28 6.198,21.107 J7.A1B12 ; J6.1 2.255,10.318 2.255,13.242 J7.S4@1.911,13.587 ; J7.B1A12 6.473,14.162 6.441,14.13 6.441,13.932 6.096,13.587 J7.S2 J7.S4@1.911,13.587 ; v1(9.017,18.847) 7.874,18.847 7.429,19.292 7.429,20.765 7.206,20.988 6.921,20.988 6.921,21.273 6.917,21.276 6.642,21.276 J7.A1B12 ; v1@9.055,18.885 11.27,18.885 ; 11.27,18.923 U3.3 ; U3.1 7.07,21.463 6.921,21.314 6.921,21.28 6.748,21.107 J7.A1B12 ; C5.1 12.358,5.473 11.862,5.969 11.862,12.435 12.366,12.939 Q1.3 13.528,13.103 13.362,13.27 12.741,13.27 12.269,13.741 v1(12.243,13.741) 12.243,15.342 12.508,15.607 12.813,15.607 13.614,16.408 20.548,16.408 v1(21.666,17.526) ; v1@21.666,17.5 R8.1 ; v1(31.115,15.164) C7.2 ; v1(45.034,18.542) 45.085,18.542 45.856,19.313 46.34,19.313 D5.1 46.963,19.836 49.665,17.134 C1.1 52.728,17.134 53.784,16.078 v1(53.797,16.078) ; J8.1@49.871,3.429 50.673,4.231 D1.1 52.402,9.93 v1(52.426,9.906) ; J9.1 54.153,28.611 54.153,20.447 54.325,20.275 55.804,20.275 56.114,19.965 56.114,19.884 U2.2@56.388,19.61 ; U2.2 U2.2@56.388,19.61 ; C4.1 61.57,8.36 ; J5.1 60.376,2.083 58.109,2.083 57.96,2.232 57.96,12.596 58.572,13.208 61.421,13.208 61.57,13.059 v1(61.57,9.449) 61.57,8.36 ; C2.1 C3.1 59.908,18.898 58.696,18.898 58.547,19.046 58.547,20.705 58.398,20.853 v1(56.413,20.853) 56.388,20.828 U2.2@56.388,19.61 ; R3.1 64.831,9.594 63.597,8.36 61.57,8.36 ; J3.2 74.801,2.54 SW1.3 SW1.4 83.348,2.068 83.871,2.591 83.871,4.296 84.909,5.334 87.634,5.334 87.782,5.483 87.782,8.132 87.634,8.28 86.12,8.28 U1.15@83.4,11 ; U1.15 U1.15@83.4,11 ; J2.6 85.676,11 U1.15@83.4,11
  Bottom Layer w0.254: v1(9.017,18.847) 9.017,18.771 6.171,15.925 6.171,13.86 J7.S2 5.984,13.673 12.175,13.673 v1(12.243,13.741) ; v1(21.666,17.526) 29.032,17.526 v1@31.115,15.443 ; v1(31.115,15.164) v1@31.115,15.443 ; J1.2 40.035,32.632 50.132,32.632 J9.1 ; v1(45.034,18.542) 44.983,18.593 34.265,18.593 v1@31.115,15.443 ; v1(52.426,9.906) 52.426,14.707 v1(53.797,16.078) ; v1(56.413,20.853) 53.797,18.237 v1(53.797,16.078) ; v1(61.57,9.449) 58.578,9.449 53.797,14.23 v1(53.797,16.078) ; J5.1 64.791,3.302 66.734,1.359 69.939,1.359 J3.2
GPIO0: J3.1 U1.18 | length 36.3
  Top Layer w0.254: v1(80.772,17.018) 82.982,17.018 U1.18
  Bottom Layer w0.254: J3.1 77.292,11.252 81.305,11.252 81.356,11.303 81.477,11.303 82.474,12.3 82.474,20.223 80.954,21.742 80.539,21.742 79.527,20.731 79.527,18.263 v1(80.772,17.018)
GPIO12: J8.2 R4.1 U1.6 | length 56.6
  Top Layer w0.254: v1(43.917,12.141) 42.255,12.141 R4.1 42.266,12.232 42.792,11.706 42.792,11.604 46.8,7.596 J8.2 ; U1.6 70.344,15 v1(70.383,14.961)
  Bottom Layer w0.254: v1(43.917,12.141) 49.352,6.706 70.739,6.706 74.99,10.956 74.99,11.167 71.196,14.961 v1(70.383,14.961)
GPIO13: D4.1 R11.2 U1.7 | length 54.3
  Top Layer w0.254: D4.1 41.897,19.836 43.204,21.143 R11.2 44.816,21.143 v1(44.831,21.158) ; U1.7 70.337,13 v1(70.383,12.954)
  Bottom Layer w0.254: v1(44.831,21.158) 48.59,17.399 48.59,8.382 49.759,7.214 70.383,7.214 74.025,10.855 74.025,11.065 72.136,12.954 v1(70.383,12.954)
GPIO14/SCLK: J5.2 U1.5 | length 30.5
  Top Layer w0.254: U1.5 69.97,17 v1(70.46,16.51)
  Bottom Layer w0.254: J5.2 61.838,6.045 71.095,6.045 75.904,10.855 75.904,11.065 v1(70.46,16.51)
GPIO15: J4.1 U1.16 | length 29
  Top Layer w0.254: v1(80.772,13.005) 80.777,13 U1.16
  Bottom Layer w0.254: J4.1 62.738,27.559 77.292,13.005 v1(80.772,13.005)
NetC6_1: C6.1 R10.2 U4.5 | length 12.1
  Top Layer w0.254: U4.5 19.98,10.597 19.98,11.086 20.339,11.445 21.425,11.445 21.933,11.953 22.413,11.953 22.929,12.47 C6.1 29.731,12.47 30.342,11.859 R10.2
NetD1_2: D1.2 R2.1 | length 4.6
  Top Layer w0.254: R2.1 49.962,12.319 50.573,12.93 D1.2
NetD2_1: D2.1 R5.2 | length 43.8
  Top Layer w0.254: D2.1 9.374,10.314 10.541,9.147 v1@10.541,9.093 ; R5.2 24.892,23.622 v1(24.917,23.647)
  Bottom Layer w0.254: v1(10.541,9.12) 11.379,8.282 11.379,1.8 11.528,1.651 17.501,1.651 22.047,6.198 22.047,15.448 20.464,17.032 20.464,19.613 22.203,21.353 22.623,21.353 v1(24.917,23.647)
NetD3_1: D3.1 R6.2 | length 37.6
  Top Layer w0.254: D3.1 9.398,5.869 10.693,4.574 v1(10.693,4.547) ; v1(21.658,19.837) R6.2
  Bottom Layer w0.254: v1(10.693,4.547) 10.693,1.139 10.842,0.991 17.856,0.991 22.555,5.69 22.555,16.394 22.109,16.84 21.374,16.84 20.972,17.242 20.972,17.81 21.374,18.212 22.406,18.212 22.555,18.361 22.555,19.101 22.313,19.343 22.152,19.343 v1(21.658,19.837)
NetD4_2: D4.2 R9.1 | length 3.6
  Top Layer w0.254: R9.1 36.539,22.836 D4.2
NetD5_2: D5.2 R11.1 | length 3.5
  Top Layer w0.254: R11.1 46.646,23.053 D5.2
NetJ4_2: J4.2 R3.2 | length 23.4
  Top Layer w0.254: J4.2 60.198,25.883 64.77,21.311 64.77,15.799 62.553,13.582 62.553,10.157 R3.2
NetQ1_2: Q1.2 Q1.5 | length 2.5
  Top Layer w0.254: Q1.5 Q1.2
NetQ1_4: Q1.4 U4.3 | length 7.7
  Top Layer w0.254: Q1.4 13.528,10.108 13.802,9.834 13.802,9.753 14.112,9.443 15.794,9.443 18.694,12.343 18.694,12.771 U4.3
NetQ1_6: Q1.6 U4.1 | length 14.7
  Top Layer w0.254: Q1.6 15.428,10.685 15.594,10.851 15.85,10.851 17.628,12.629 17.628,15.701 17.776,15.85 22.225,15.85 22.504,15.57 22.504,14.991 20.762,13.249 U4.1
NetR5_1: R5.1 U3.6 | length 7.2
  Top Layer w0.254: U3.6 17.892,18.923 21.143,22.174 R5.1
NetR6_1: R6.1 U3.7 | length 21.4
  Top Layer w0.254: U3.7 17.892,20.193 22.032,24.333 28.604,24.333 28.753,24.184 28.753,21.26 28.524,21.031 24.965,21.031 24.816,20.882 24.816,19.925 R6.1
NetR7_2: R7.2 U3.2 | length 24.6
  Top Layer w0.254: v1(10.49,20.193) U3.2 ; R7.2 v1(19.939,5.842)
  Bottom Layer w0.254: v1(10.49,20.193) 13.589,17.094 13.589,9.293 13.738,9.144 19.837,9.144 19.986,8.995 19.986,5.889 v1(19.939,5.842)
NetR8_2: R8.2 U4.2 | length 10
  Top Layer w0.254: U4.2 19.98,12.771 19.98,12.282 20.309,11.953 21.215,11.953 23.114,13.852 23.114,15.748 23.546,16.18 24.819,16.18 24.968,16.329 24.968,17.45 R8.2@24.892,17.526
RST: C4.2 SW1.1 SW1.2 U1.1 | length 51
  Top Layer w0.254: C4.2 58.747,10.16 58.598,10.011 58.598,7.239 58.747,7.09 74.751,7.09 SW1.1 ; U1.1 68.4,25 75.431,17.969 75.431,6.726 SW1.1 ; SW1.2 SW1.1
RX: J2.3 U1.21 | length 5.6
  Top Layer w0.254: U1.21 85.204,23 J2.3
SCL: J9.3 U1.20 | length 52.2
  Top Layer w0.254: v1(80.747,20.98) 82.98,20.98 U1.20
  Bottom Layer w0.254: J9.3 51.526,26.238 62.87,26.238 76.789,12.319 81.056,12.319 81.458,12.721 81.458,17.302 80.751,18.009 80.742,18.009 80.035,18.715 80.035,20.269 v1(80.747,20.98)
SDA: J9.4 U1.19 | length 53.4
  Top Layer w0.254: v1(80.721,18.999) U1.19
  Bottom Layer w0.254: J9.4 49.737,25.527 62.738,25.527 76.454,11.811 81.266,11.811 81.966,12.51 81.966,17.755 v1(80.721,18.999)
TX: J2.2 U1.22 | length 5.4
  Top Layer w0.254: U1.22 85.744,25 J2.2
"VCC 3V3": C2.2 C3.2 J1.1 J5.3 J8.3 J9.2 R1.1 R2.2 R4.2 R9.2 U1.8 U2.5 | length 98.2